# Altium PCB Version_2018_01.PcbDoc
Units mil, origin at the board's own origin, x right, y up, seen from the top; angles counter-clockwise.
Board outline 6000 x 4000 mil, 2 copper layers (Top Layer, Bottom Layer); 51 components, 26 nets, 155 pads, 47 vias.
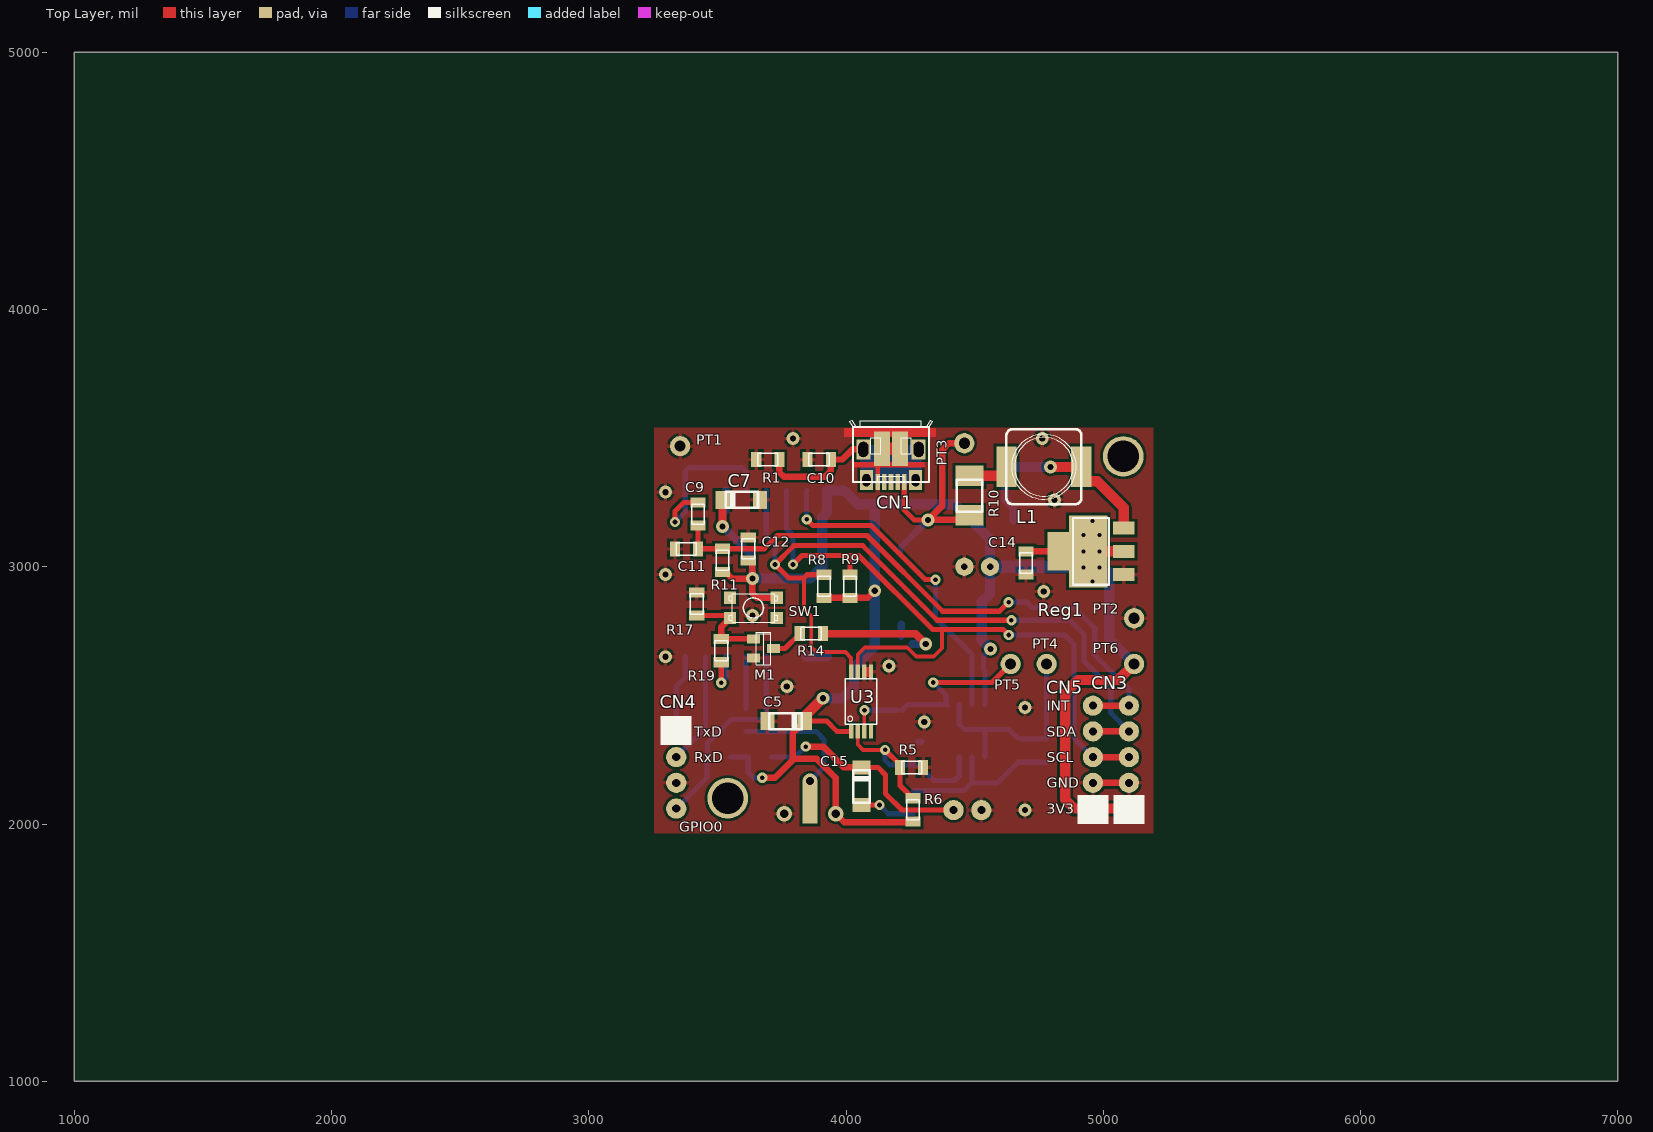
[diagram p0: Top Layer view]
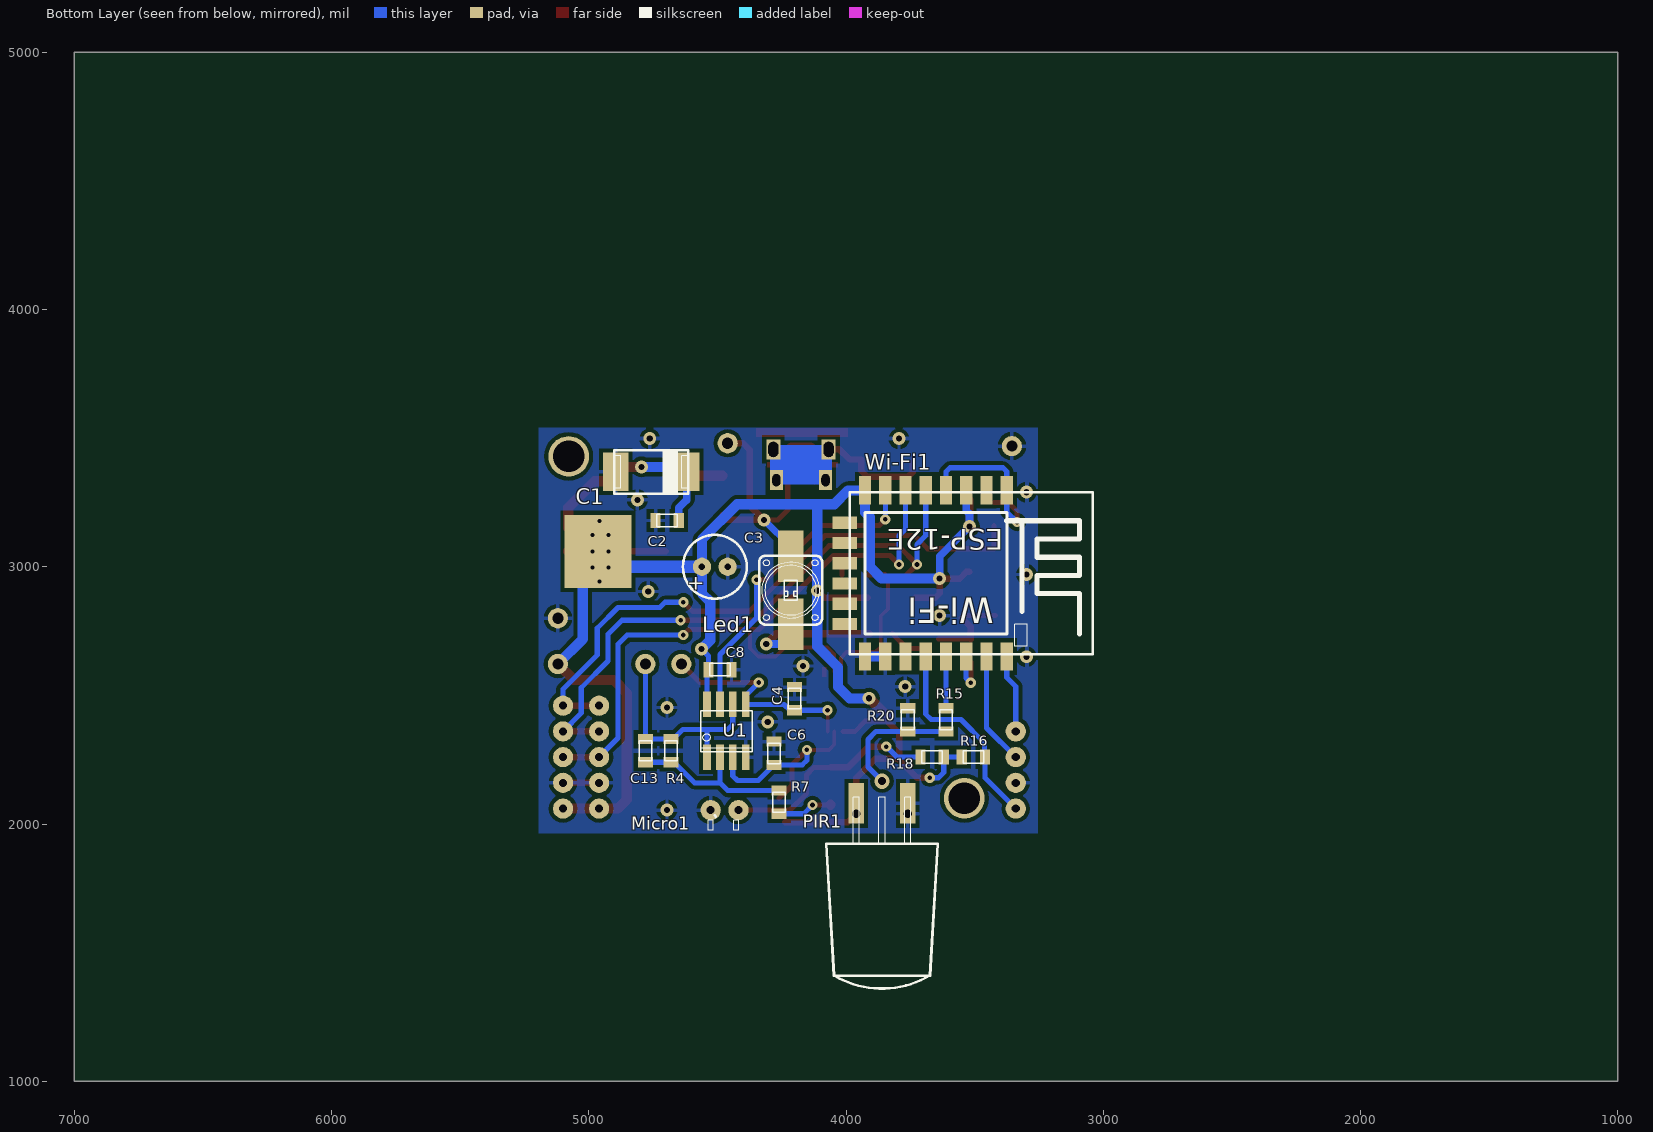
[diagram p1: Bottom Layer view, seen from below]

## Layer stack, top to bottom
Top Layer: signal copper 1.4
Dielectric: dielectric 12.6, FR-4, Dk 4.8
Bottom Layer: signal copper 1.4

## Board outline
1000,1000 7000,1000 7000,5000 1000,5000

## Design rules (kind name [scope] priority, off if disabled: settings)
Clearance [All] p1: gap=4
ComponentClearance [All] p1: gap=5 collisioncheckmode=3 verticalgap=5 showdistances=FALSE
Height [All] p1: minheight=0 maxheight=10000 prefheight=500
MinimumSolderMaskSliver [All] p1: minsoldermaskwidth=4
PasteMaskExpansion [All] p1: expansion=2
PolygonConnect [All] p1: connectstyle=Relief reliefconductorwidth=15 reliefentries=4 polygonreliefangle="90 Angle"
RoomDefinition Version_2018_01 [InComponentClass('Version_2018_01')] p1: confinementstyle=ConfineIn formatcopy=TRUE lockcomponents=FALSE outline 3023,1279 5219,1279 5219,3611 3023,3611
RoutingVias [All] p1: holewidth=28 width=50 viastyle="Through Hole" minholewidth=12 minwidth=20 maxholewidth=130 maxwidth=250
SilkToSilkClearance [All] p1: silktosilkclearance=4
SilkscreenOverComponentPads [All] p1: minsilkscreentomaskgap=4
SolderMaskExpansion [All] p1: expansion=4
Width [All] p1: maxlimit=80 minlimit=5 preferedwidth=10
22 further rules are at their usual default settings.

## Components (designator, comment, footprint, x,y, rotation, side; value= is the part's Value field where it differs from the comment)
C1 "220µF/16V" 7343-31 4875,3369 r180 bottom
C2 "100n" 0805 4740,3180 r180 bottom
C3 "47µF/16V" 47µF/16V 4460,3000 r0 bottom
C4 "100n" 0805 4200,2532 r270 bottom
C5 "10µF/6V3 tantale" "Tantale 10µF/6V3" 3840,2400 r180 top
C6 "100n" 0805 4280,2230 r90 bottom
C7 "10µF/6V3 tantale" "Tantale 10µF/6V3" 3520,3260 r0 top
C8 "100n" 0805 4445,2600 r0 bottom
C9 "100n" 0805 3425,3160 r90 top
C10 "100 n" 0805 3851,3417 r0 top
C11 "100n" 0805 3335,3069 r0 top
C12 "100n" 0805 3620,3114 r270 top
C13 "120p" 0805 4780,2240 r90 bottom
C14 "220n" 0805 4700,2970 r90 top
C15 "1µF/16V" 3216-18 4060,2220 r270 top
CN1 "USB Micro B" "USB Micro 714-2347" 4175,3329 r180 top
CN3 "inch_ligne 1x5" INCH_1x5_ver2_droit 5100,2060 r90 top
CN4 "inch_ligne 1x4" INCH_1x4_ver2_droit 3340,2360 r270 top
CN5 "inch_ligne 1x5" INCH_1x5_ver2_droit 4960,2060 r90 top
L1 "100µH CD74R series" "SELF CD74R" 4915,3389 r0 top
Led1 "LTW5AM" LTW5AM 4215,2909 r270 bottom
M1 "NTR4501N" "SOT23 (NTR4501)" 3640,2720 r270 top
Micro1 "Electret" "Micro_electret simple" 4426,2054 r180 bottom
PIR1 "PIR_WL" PIR_WL 3960,2080 r180 bottom
PT1 "GND" "PTEST boucle"#1 3355,3469 r0 top
PT2 "GND" "PTEST boucle"#1 5120,2800 r0 top
PT3 "+5V" "PTEST boucle"#1 4460,3480 r0 top
PT4 "Son" "PTEST boucle"#2 4780,2620 r0 top
PT5 "Seuil" "PTEST boucle"#2 4640,2620 r0 top
PT6 "+3V3" "PTEST boucle"#3 5120,2640 r0 top
R1 "100K" 0805 3651,3417 r0 top
R4 "100K" 0805 4680,2240 r90 bottom
R5 "10K" 0805 4300,2220 r180 top
R6 "10K" 0805 4260,2100 r270 top
R7 "1K" 0805 4260,2040 r90 bottom
R8 "10K" 0805 3915,2969 r270 top
R9 "10K" 0805 4015,2969 r270 top
R10 "0R33" 1210 4480,3200 r90 top
R11 "4K7" 0805 3520,3070 r270 top
R14 "68" 0805 3820,2740 r0 top
R15 "330" 0805 3611,2450 r270 bottom
R16 "10K" 0805 3460,2260 r0 bottom
R17 "15K" 0805 3420,2900 r270 top
R18 "2K" 0805 3710,2260 r180 bottom
R19 "470" 0805 3515,2629 r90 top
R20 "15K" 0805 3760,2450 r270 bottom
Reg1 "LM1117/33" "SOT-223 thermo1" 5080,3060 r90 top
SW1 "KMR 4" "µSwitch KMR4" 3640,2840 r0 top
U1 "AD8052" SOIC08 4540,2260 r90 bottom
U3 "MCP47FEB21" TSSOP_8 4020,2360 r90 top
Wi-Fi1 "ESP-12E" ESP-12E 3375,3289 r270 bottom

## Footprints (in the part's own frame and the unit in brackets; to place one, negate y for a bottom-side part, rotate by r counter-clockwise, add the part's x,y. Pads: shape width x height; smd on the part's side, far side on the other; paste and mask are expansions set on the pad)
47µF/16V [mm]
  round 1.8 hole 0.65: 1(2.54,0) 2(0,0)
  silkscreen extent -1.88,-3.15 4.42,3.15
0805 [mm] "résistance CMS"
  rect 1x1.5 smd: 1(0,0) 2(2.286,0)
  silkscreen extent 0.13,-0.63 2.13,0.63
1210 [mm] "résistance CMS 0,5W ERJ14B"
  rect 2x2.8 smd: 1(0,0) 2(3.9,0)
  silkscreen extent 0.33,-1.26 3.53,1.24
3216-18 [mm] "condensateur tantale CMS (3,2 x 1,6 x 1,6)"
  rect 1.4x1.8 smd: 1(0,0) 2(3.7,0)
  silkscreen extent 0.3,-0.79 3.5,0.81
7343-31 [mm] "condensateur tantale CMS (7,3 x 4,3 x 3,0)"
  rect 2.5x3.8 smd: 1(6.5,0) 2(-0.5,0)
  silkscreen extent -0.65,-2.15 6.65,2.15
ESP-12E [mm] "module Wi-Fi"
  rect 2.8x1.2 smd: 1(-0.2,0) 2(-0.2,-2) 3(-0.2,-4) 4(-0.2,-6) 5(-0.2,-8) 6(-0.2,-10) 7(-0.2,-12) 8(-0.2,-14) 15(16.2,-14) 16(16.2,-12) 17(16.2,-10) 18(16.2,-8) 19(16.2,-6) 20(16.2,-4) 21(16.2,-2) 22(16.2,0)
  rect 1.2x2.4 smd: 9(3,-16) 10(5,-16) 11(7,-16) 12(9,-16) 13(11,-16) 14(13,-16)
  silkscreen extent 0,-15.5 16,8.5
INCH_1x4_ver2_droit [mm] "simple rangée 2,54 mm"
  round 2 hole 0.8: 1(0,0) 2(2.54,0) 3(5.08,0) 4(7.62,0)
  silkscreen extent -1.52,-1.55 1.35,1.52
INCH_1x5_ver2_droit [mm] "simple rangée 2,54 mm"
  round 2 hole 0.8: 1(0,0) 2(2.54,0) 3(5.08,0) 4(7.62,0) 5(10.16,0)
  silkscreen extent -1.52,-1.52 1.35,1.55
LTW5AM [mil] "LED golden dragon"
  rect 200x100 smd: 1(-132,0) 2(132,0)
  silkscreen extent -134,-122 134,122
"Micro_electret simple" [mm] "Microphone coudé sur PCB sans sérigraphie"
  round 2 hole 0.8: 0(-2.54,0) 1(0.203,0)
  silkscreen extent -2.79,-2 0.25,-0.51
PIR_WL [mm] "détecteur infrarouge"
  rect 1.5x4 smd: 1(0,0) 3(5.08,0)
  rect 1.5x4 smd far side: 2(2.54,0)
  silkscreen extent -2.96,-18.28 8.04,0.6
"PTEST boucle"#1 [mm] "RS 262-2179"
  round 2 hole 1.1: 1(0,0)
"PTEST boucle"#2 [mm] "RS 262-2179"
  round 2 hole 1.1: 1(0,0.051)
"PTEST boucle"#3 [mm] "RS 262-2179"
  round 2 hole 1.1: 1(0,-0.457)
"SELF CD74R" [mm] "Self 7,4 x 7,4"
  rect 2x4 smd: 1(0,0) 2(-7.4,0)
  silkscreen extent -7.4,-3.7 0,3.7
SOIC08 [mil]
  rect 100x30 smd: 1(0,0) 2(0,-50) 3(0,-100) 4(0,-150) 5(205,-150) 6(205,-100) 7(205,-50) 8(205,0)
  silkscreen extent 20,-175 181,25
"SOT23 (NTR4501)" [mil] "D->1 G->2 S->3"
  rect 35x50 smd: 1(37.4,78.74) 2(0,0) 3(74.8,0)
  silkscreen extent -25,12 100,68
"SOT-223 thermo1" [mil] "empreinte pour SOT-223"
  rect 50x84.65 smd: 1(-90.55,0) 2(0,0) 3(90.55,0)
  rect 150x90 smd: 2(0,251.97)
  rect 280x150 smd: 2(0,138)
  rect 284x260 smd far side: 2(0,116)
  silkscreen extent -130,57 130,197
"Tantale 10µF/6V3" [mm] "1206 ou 3216-18 (175-4041)"
  rect 1.4x1.8 smd: 1(0,0) 2(3.7,0)
  silkscreen extent 0.3,-0.79 3.5,0.81
TSSOP_8 [mm]
  rect 1.4x0.42 smd: 1(0,0) 2(0,-0.65) 3(0,-1.3) 4(0,-1.95) 5(5.9,-1.95) 6(5.9,-1.3) 7(5.9,-0.65) 8(5.9,0)
  silkscreen extent 0.7,-2.51 5.2,0.58
"USB Micro 714-2347" [mm] "empreinte pour micro USB RS 714-2347"
  rect 0.45x1.6 smd: 1(-1.3,0) 2(-0.65,0) 3(0,0) 4(0.65,0) 5(1.3,0)
  rect 1.3x2 hole 0.8 slot 1.2 at 90 deg: 6(-2.425,-0.2) 7(2.425,-0.2)
  rect 1.4x2 hole 1 slot 1.5 at 90 deg: 8(-2.725,-3.23) 9(2.725,-3.23)
  rect 1.6x3.4 smd: 10(-0.9,-3.3) 11(0.9,-3.3)
  silkscreen extent -4.1,-6.12 4.1,0
"µSwitch KMR4" [mm] "µSwitch KMR 4"
  rect 1.2x1.2 smd: 1(-2.3,1) 2(2.3,1) 3(-2.3,-1) 4(2.3,-1)
  silkscreen extent -2.4,-1.4 2.4,1.4

## Part data
C1: library part "tantale 220µF/16V", "253-5290 case 7343-31"
C2 C4 C6 C8 C9 C10 C11 C12 C13 C14: library part Cap_CMS_0805, "CMS 0805"
C3: "électrochimique diam. 6,3mm 128-1810"
C5 C7: library part "tantale 10µF/6V3", "175-4041 ou 145-7412 case 3216-18"
C15: library part "tantale 1µF/16V", "145-7406 case 3216-18"
CN1: "Amphenol 714-2347"
CN3 CN5: library part Inch_1x5_droit, "Inch_1x5_droit"
CN4: library part Inch_1x4_droit, "Inch_1x4_droit"
L1: library part "Self CD74R", "SMT CD74R Aliexpress"
Led1: library part "LTW5AM LED", "LED Golden Dragon Plus"
M1: "MOSFET canal N"
Micro1: library part Microphone_03, "Microphone électret"
PIR1: library part PIR_01, "Détecteur infrarouge"
PT1 PT2 PT3 PT4 PT5 PT6: library part "PTEST boucle", "pointe de test CI 262-2179"
R1 R4 R5 R6 R7 R8 R9 R11 R14 R15 R16 R17 R18 R19 R20: library part "Res CMS 0805", "CMS 0805"
R10: library part "Res CMS 1210 ERJ14B", "CMS 1210"
Reg1: library part LM1117MPX-3.3, "Régulateur SOT-223"
SW1: library part µSwitch, "KMR 4 Series 793-1605"
U1: "AOP"
U3: "DAC I2C (RS : 879-3261)"
Wi-Fi1: "ESP-12E module Wi-Fi"

## Free pads (board coordinates)
  round 158 hole 122: 1(3540,2100) 2(5078,3429)

## Via types
v1: diameter 50, hole 24, Top Layer to Bottom Layer, 21 vias
v2: diameter 40, hole 18, Top Layer to Bottom Layer, 15 vias
v3: diameter 39.37, hole 15.75, Top Layer to Bottom Layer, 8 vias
v4: diameter 60, hole 32, Top Layer to Bottom Layer, 3 vias

## Nets (pads, with @x,y where several pads share a name; then routed paths per layer and width w, separated by ;. In a path a pad name is that pad's centre, name@x,y a point inside that pad or via, vN(x,y) a via of type N, cw(c..) or ccw(c..) an arc to the next point about the centre after c; other vN are vias at no path point)
3V3: C3.1 C5.1 C7.1 C8.2 C12.2 C14.2 CN3.1 CN5.1 PIR1.1 PT6.1 R6.2 R8.2 R9.2 R11.2 R16.2 R18.2 Reg1.2 SW1.2 U1.8 U3.1 Wi-Fi1.3 Wi-Fi1.8 | length 7416.9
  Top Layer w20: C5.1 3925,2400 3966,2359 U3.1@4012,2359
  Top Layer w25: R11.2 3532,2980 3558,2954 v1(3636,2954) ; C12.2@3636,3018 v1(3636,2954) ; v2(3674,2180) 3724,2180 3793,2249 3793,2353 C5.1 ; SW1.2 3653.63,2879.37 3636,2897 v1(3636,2954) ; 3793,2253 3886,2253 3960,2179 v4(3960,2040) 3993,2007 R6.2@4236,2007 ; R8.2 R9.2 4084,2879 v1(4112,2907) ; C14.2 Reg1.2@4828.03,3060
  Top Layer w30: v1(3520,3157) C7.1
  Top Layer w40: C5.1@3840,2419 v1(3910,2489) ; Reg1.2@4995,3007 4942,3060 Reg1.2@5080,3060 ; CN3.1 4887,2060 4852,2095 4852,2509 4903,2560 5058,2560 PT6.1
  Bottom Layer w20: R16.2 R18.2 3620,2200 3640,2180 v2(3674,2180) ; C8.2 4535,2653 v1(4562,2680) ; U1.8 C8.2@4540,2595
  Bottom Layer w30: Wi-Fi1.3 3532.48,3217.48 3520,3205 v1(3520,3157) 3636,3041 v1(3636,2954)
  Bottom Layer w40: v1(3636,2954) 3861,2954 3908,3001 3908,3193 3926.18,3211.18 Wi-Fi1.8 3992.13,3296.87 4046,3243 4423,3243 4560,3106 C3.1 4560,2896 4528,2864 4528,2714 v1(4562,2680) ; v1@3910,2488 3986,2488 4031,2533 4031,2610 4112,2691 v1(4112,2907) 4112,3239 ; Reg1.2@5023,2979 5023,2719 PT6.1
  Bottom Layer w50: C3.1 Reg1.2@4904,3000
  other v3: 4957.95,2941.89 4922.52,2997.01 4985.51,2997.01 4922.52,3060 4985.51,3060 4922.52,3122.99 4985.51,3122.99 4957.95,3178.11
+5V: CN1.1 Led1.1 PT3.1 R10.1 | length 961.2
  Top Layer w20: CN1.1 4226.18,3220.82 4265,3182 v1(4319,3182)
  Top Layer w25: PT3.1 4400,3480 4375,3455 4375,3238 v1(4319,3182) 4462,3182 R10.1
  Bottom Layer w15: Led1.1 Led1.1@4215,3078
  Bottom Layer w25: Led1.1@4215,3078 v1(4319,3182)
EARTH: C10.2 CN1.6 CN1.7 CN1.8 CN1.9 R1.2 | length 1100.1
  Top Layer w10: R1.2@3741,3407 R1.2 R1.2@3741,3427
  Top Layer w25: R1.2@3741,3407 3741,3368 3759,3350 3918,3350 3941,3373 C10.2 3986,3417 4025.17,3456.17 CN1.9
  Bottom Layer w10: CN1.7@4067.72,3348.69 CN1.7
  Bottom Layer w25: CN1.7@4067.72,3348.69 CN1.9 ; CN1.6@4282.28,3348.69 CN1.8
  Bottom Layer w35: CN1.9 CN1.8 ; CN1.7 CN1.6
GND: C1.2 C2.1 C3.2 C4.1 C5.2 C6.2 C7.2 C8.1 C10.1 C11.1 C12.1 C14.1 CN1.5 CN1.10 CN1.11 CN3.2 CN4.3 CN5.2 M1.3 Micro1.0 PIR1.3 PT1.1 PT2.1 R1.1 R5.1 R17.1 R20.1 Reg1.1 U1.4 U3.5 U3.6 Wi-Fi1.15 Wi-Fi1.16 | length 442.9
  Top Layer w18: CN1.5 CN1.11@4123.82,3443.17
  Top Layer w25: CN5.2 CN3.2
  Top Layer w50: CN1.11 CN1.10
  Bottom Layer w20: Wi-Fi1.16 Wi-Fi1.16@3848,2650.65
  Bottom Layer w25: C6.2 C6.2@4293,2320 ; C1.2@4894.69,3343.68 C1.2
  Bottom Layer w40: Wi-Fi1.16 Wi-Fi1.15
  other v1: 4696,2054 4304,2397 4696,2453 3770,2534 4167,2614 3298,2650 3636,2810 4769,2904 3298,2970 4811,3260 3298,3290 3794,3498 4763,3498
  other v4: 3760,2040
GPIO0: CN4.4 R16.1 Wi-Fi1.18 | length 793.7
  Bottom Layer w20: CN4.4 3460,2180 R16.1 ; R16.1@3461,2270 3461,2314 3553,2406 3669,2406 3689.96,2426.96 Wi-Fi1.18
INT: C9.1 C11.2 CN3.5 CN5.5 R11.1 | length 2328.7
  Top Layer w10: C11.2 C11.2@3426,3070
  Top Layer w20: C11.2 C9.1 ; C11.2@3426,3070 R11.1 3682,3070 3733,3121 4082,3121 4376,2827 4597,2827 v2(4632,2862)
  Top Layer w25: CN5.5 CN3.5
  Bottom Layer w20: v2(4632,2862) 4704,2862 4724,2842 4886,2842 4967,2761 4967,2657 5100,2524 CN3.5
NetC1_1: C1.1 C2.2 L1.1 Reg1.3 | length 801.9
  Top Layer w10: L1.1 L1.1@4917.09,3386.91
  Top Layer w40: v1(4795,3388) L1.1@4914,3388 ; L1.1@4895,3369 L1.1@4914,3388 ; L1.1 L1.1@4914,3388 ; L1.1@4935,3332 4977,3332 5080,3229 Reg1.3
  Bottom Layer w30: C1.1 4619.09,3259.91 4650,3229 C2.2
  Bottom Layer w40: C1.1 4638.09,3388 v1(4795,3388)
NetC4_2: C4.2 PT5.1 U1.5 U3.3 | length 834.5
  Top Layer w15: U3.3 v2@4071.18,2441.18
  Top Layer w20: v2@4071.18,2441.18 v2(4072,2442) ; v2(4339,2550) 4568,2550 PT5.1
  Bottom Layer w20: v2(4072,2442) C4.2 ; C4.2@4218,2442 4241,2465 U1.5 ; v2(4339,2550) 4390,2499 U1.5 ; U1.5@4394,2461 U1.5
NetC6_1: C6.1 R5.2 R6.1 U1.3 U3.2 | length 840.4
  Top Layer w15: U3.2 4045.59,2308.41 4066,2288 v2(4152,2288) ; R5.2 R5.2@4210,2230
  Top Layer w20: v2(4152,2288) R5.2@4210,2230 ; R5.2 4210,2150 R6.1
  Bottom Layer w20: v2(4152,2288) 4152,2248 4170,2230 C6.1 4341,2169 4422,2169 4440,2187 U1.3
NetC9_2: C9.2 Wi-Fi1.1 Wi-Fi1.4 | length 680.3
  Top Layer w20: v2(3335,3174) 3335,3216 3369,3250 C9.2
  Bottom Layer w20: v2(3335,3174) 3375,3214 Wi-Fi1.1 3375,3370 3390,3385 3596,3385 3611.22,3369.78 Wi-Fi1.4
NetC13_1: C13.1 R4.1 R7.2 U1.2 | length 657.4
  Bottom Layer w20: R7.2 4460,2130 4490,2160 ; U1.2 4490,2160 ; R4.1@4671,2242 4589,2160 4490,2160 ; R4.1 C13.1
NetC13_2: C13.2 PT4.1 R4.2 U1.1 U1.6 | length 827.4
  Bottom Layer w20: U1.6 4440,2388 4460,2368 4540,2368 ; U1.1 4540,2368 ; R4.2@4668,2334 4634,2368 4540,2368 ; R4.2 C13.2 PT4.1
NetC15_1: C15.1 Micro1.1 R18.1 | length 863.1
  Top Layer w20: C15.1 4125,2220 4154,2191 4154,2118 4218,2054 Micro1.1@4411,2054
  Top Layer w25: v2(3843,2301) 3911,2301 3992,2220 C15.1
  Bottom Layer w20: R18.1 3802,2260 v2(3843,2301)
NetC15_2: C15.2 R7.1 | length 214.2
  Top Layer w20: C15.2@4060.33,2074 v2(4130,2074)
  Top Layer w40: C15.2 C15.2@4060.33,2074
  Bottom Layer w20: v2(4130,2074) 4164,2040 R7.1
NetL1_2: L1.2 R10.2 | length 158.3
  Top Layer w10: L1.2@4588.2,3353.54 L1.2
  Top Layer w40: R10.2 L1.2@4588.2,3353.54
NetLed1_2: Led1.2 R14.2 | length 514.6
  Top Layer w30: R14.2 4270,2740 v1(4310,2700)
  Bottom Layer w30: Led1.2@4215,2731 Led1.2 ; Led1.2@4258,2700 v1(4310,2700)
NetM1_1: M1.1 R14.1 | length 125
  Top Layer w20: M1.1 3762.6,2682.6 R14.1
NetM1_2: M1.2 R17.2 R19.2 SW1.3 | length 342.2
  Top Layer w20: R17.2 SW1.3@3540.08,2810 ; R19.2@3514.45,2718.45 R19.2 3516,2720 M1.2
  Top Layer w25: R19.2 3515,2766.18 SW1.3
NetPIR1_2: PIR1.2 R15.2 R20.2 | length 501.6
  Bottom Layer w20: R15.2 R20.2 3884,2360 3915,2329 3915,2222 v4(3860,2167)
NetR15_1: R15.1 Wi-Fi1.19 | length 201.3
  Bottom Layer w10: Wi-Fi1.19@3611,2650.98 Wi-Fi1.19
  Bottom Layer w20: R15.1 Wi-Fi1.19@3611,2650.98
NetR19_1: R19.1 Wi-Fi1.20 | length 190.7
  Top Layer w20: v2(3515,2549) R19.1
  Bottom Layer w20: v2(3515,2549) 3534,2568 3534,2649.68 Wi-Fi1.20
NetU1_7: U1.7 Wi-Fi1.7 | length 1254.8
  Top Layer w20: v2(3847,3184) 3870,3161 4097,3161 4308,2950 v2(4348,2950)
  Bottom Layer w20: v2(3847,3184) 3847,3296.43 Wi-Fi1.7 ; v2(4348,2950) 4348,2801 4490,2659 U1.7
RXD: CN4.2 Wi-Fi1.21 | length 438.3
  Bottom Layer w20: CN4.2 3453.74,2373.74 Wi-Fi1.21
SCL: CN3.3 CN5.3 R9.1 U3.7 Wi-Fi1.6 | length 2738.2
  Top Layer w15: U3.7 4045.59,2658.59 4073,2686 4238,2686 4273,2651 4341,2651 4373,2683 4373,2756
  Top Layer w20: v2(3794,3009) 3829,3044 4015,3044 ; R9.1 4015,3044 ; v2(4632.17,2734.83) 4611,2756 4337,2756 4049,3044 4015,3044
  Top Layer w25: CN5.3 CN3.3
  Bottom Layer w20: Wi-Fi1.6 3768.7,3147.3 3794,3122 v2(3794,3009) ; v2(4632.17,2734.83) 4850.17,2734.83 4886,2699 4886,2334 CN5.3
SDA: CN3.4 CN5.4 R8.1 U3.8 Wi-Fi1.5 | length 2989.3
  Top Layer w15: 3837,2957 3837,2836 3865,2808 3865,2688.12 3885.12,2668 3998,2668 4020,2646 U3.8
  Top Layer w20: R8.1 3849,2969 3837,2957 3776,2957 v2(3724,3009) 3797,3082 4065,3082 4355,2792 v2(4643,2792)
  Top Layer w25: CN5.4 CN3.4
  Bottom Layer w20: Wi-Fi1.5 3689.96,3121.04 3724,3087 v2@3724,3010 ; v2(4643,2792) 4871,2792 4925,2738 4925,2634 5029,2530 5029,2431 CN3.4
TXD: CN4.1 Wi-Fi1.22 | length 305.7
  Bottom Layer w20: CN4.1 3340,2535 3375,2570 Wi-Fi1.22
pads on no net: CN1.2 CN1.3 CN1.4 SW1.1 SW1.4 U3.4 Wi-Fi1.2 Wi-Fi1.9 Wi-Fi1.10 Wi-Fi1.11 Wi-Fi1.12 Wi-Fi1.13 Wi-Fi1.14 Wi-Fi1.17

## Polygon pours and split planes (outlines as drawn)
GND on Top Layer "Bottom Layer-No Net" (solid, pour order 1000): 3255,3540 5195,3540 5195,1965 3255,1965 3255,3540
GND on Bottom Layer "Bottom Layer-No Net" (solid, pour order 1000): 3255,3540 5195,3540 5195,1965 3255,1965 3255,3540

## Other copper
Top Layer:
  rectangle net GND: 3993,3505 4350,3539
  rectangle net GND: 4075,2572 4094,2610
  rectangle net GND: 4031,3386 4308,3407
Bottom Layer:
  rectangle net EARTH: 4067.72,3331 4278,3456.17

## Silkscreen, mask and mechanical layers (free items; w line width, h text height)
Top Overlay:
  text "INT" at 4780,2440 h40
  text "TxD" at 3410,2340 h40
  text "SDA" at 4780,2340 h40
  text "RxD" at 3410,2240 h40
  text "SCL" at 4780,2240 h40
  text "GND" at 4780,2140 h40
  text "3V3" at 4780,2040 h40
  text "GPIO0" at 3351,1969 h40
Mechanical 1:
  lines w10: 3255,1965 3255,3539 5195,3539 5195,1965 3255,1965

## Text inside footprints (layer, text, board x,y; h text height)
C3: Bottom Overlay "+" at 4550,2960 h60 r180
Wi-Fi1: Bottom Overlay "Wi-Fi" at 3425,2879 h100 r180